# Altium PCB PCB_Tsal.PcbDoc
Units mm, origin at the board's own origin, x right, y up, seen from the top; angles counter-clockwise.
Board outline 49.2 x 43.9 mm, 2 copper layers (Top Layer, Bottom Layer); 12 components, 10 nets, 32 pads, 7 vias.
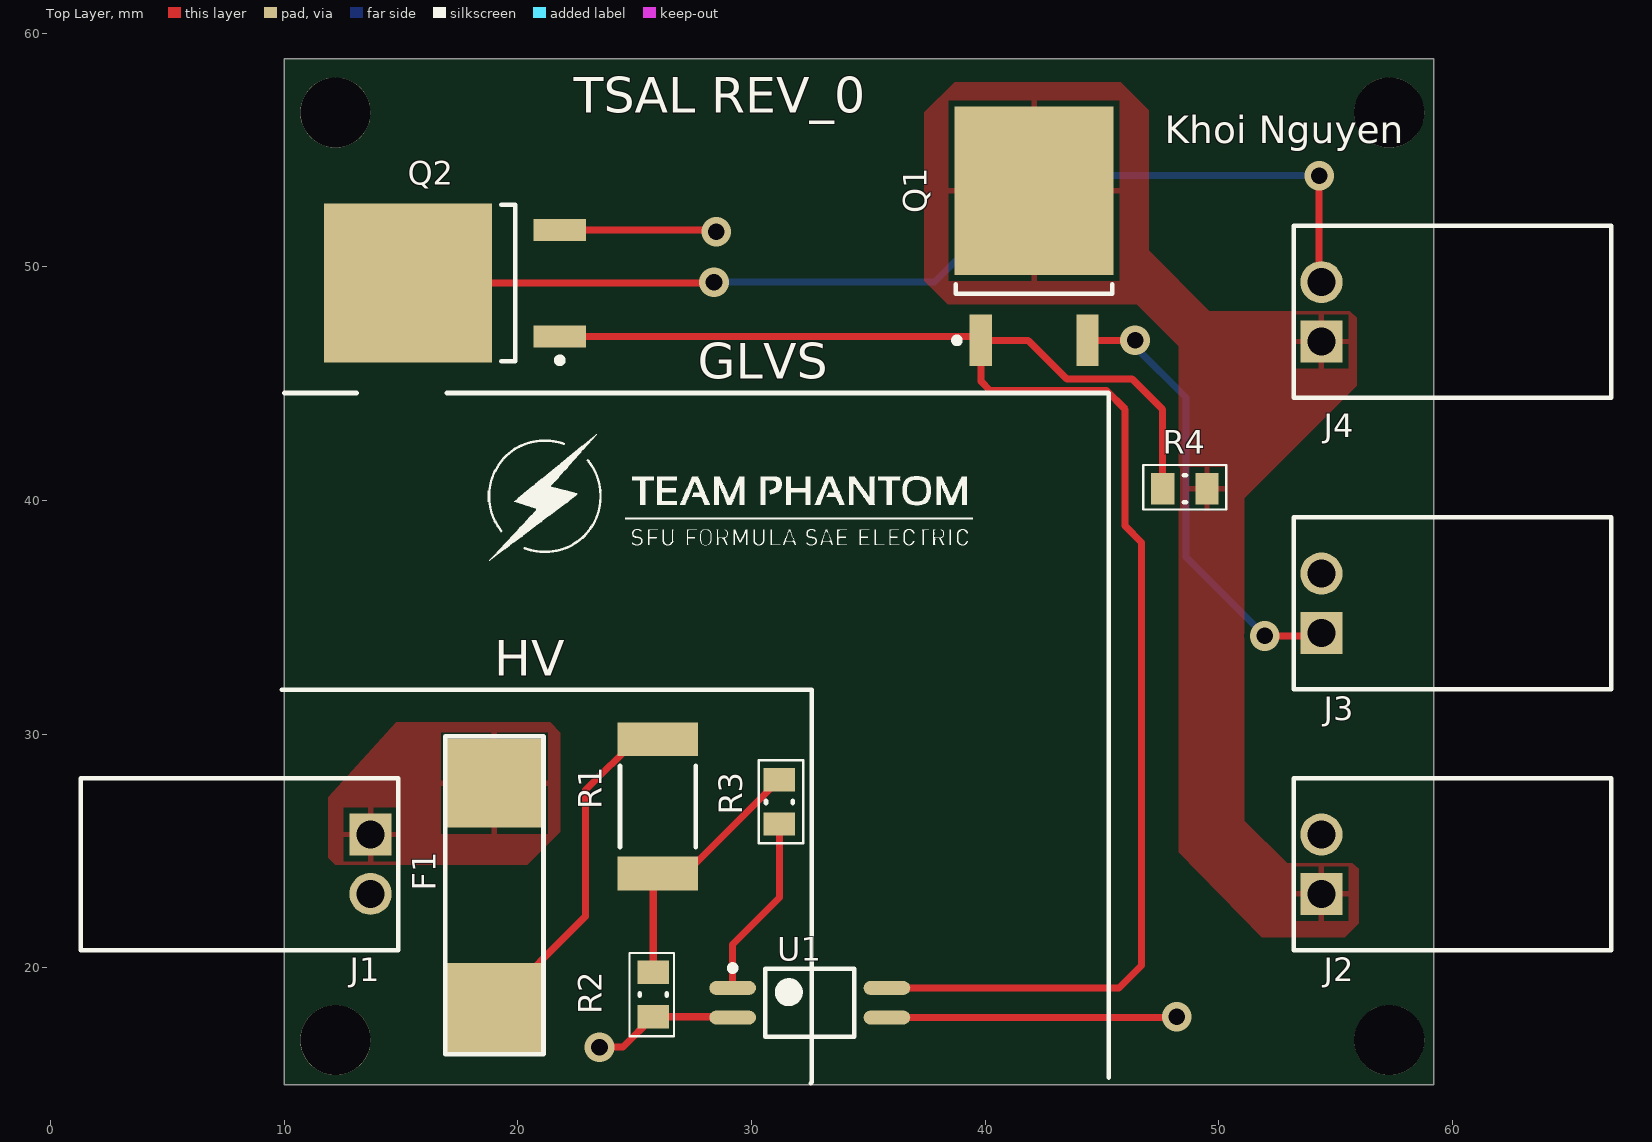
[diagram p0: Top Layer view]
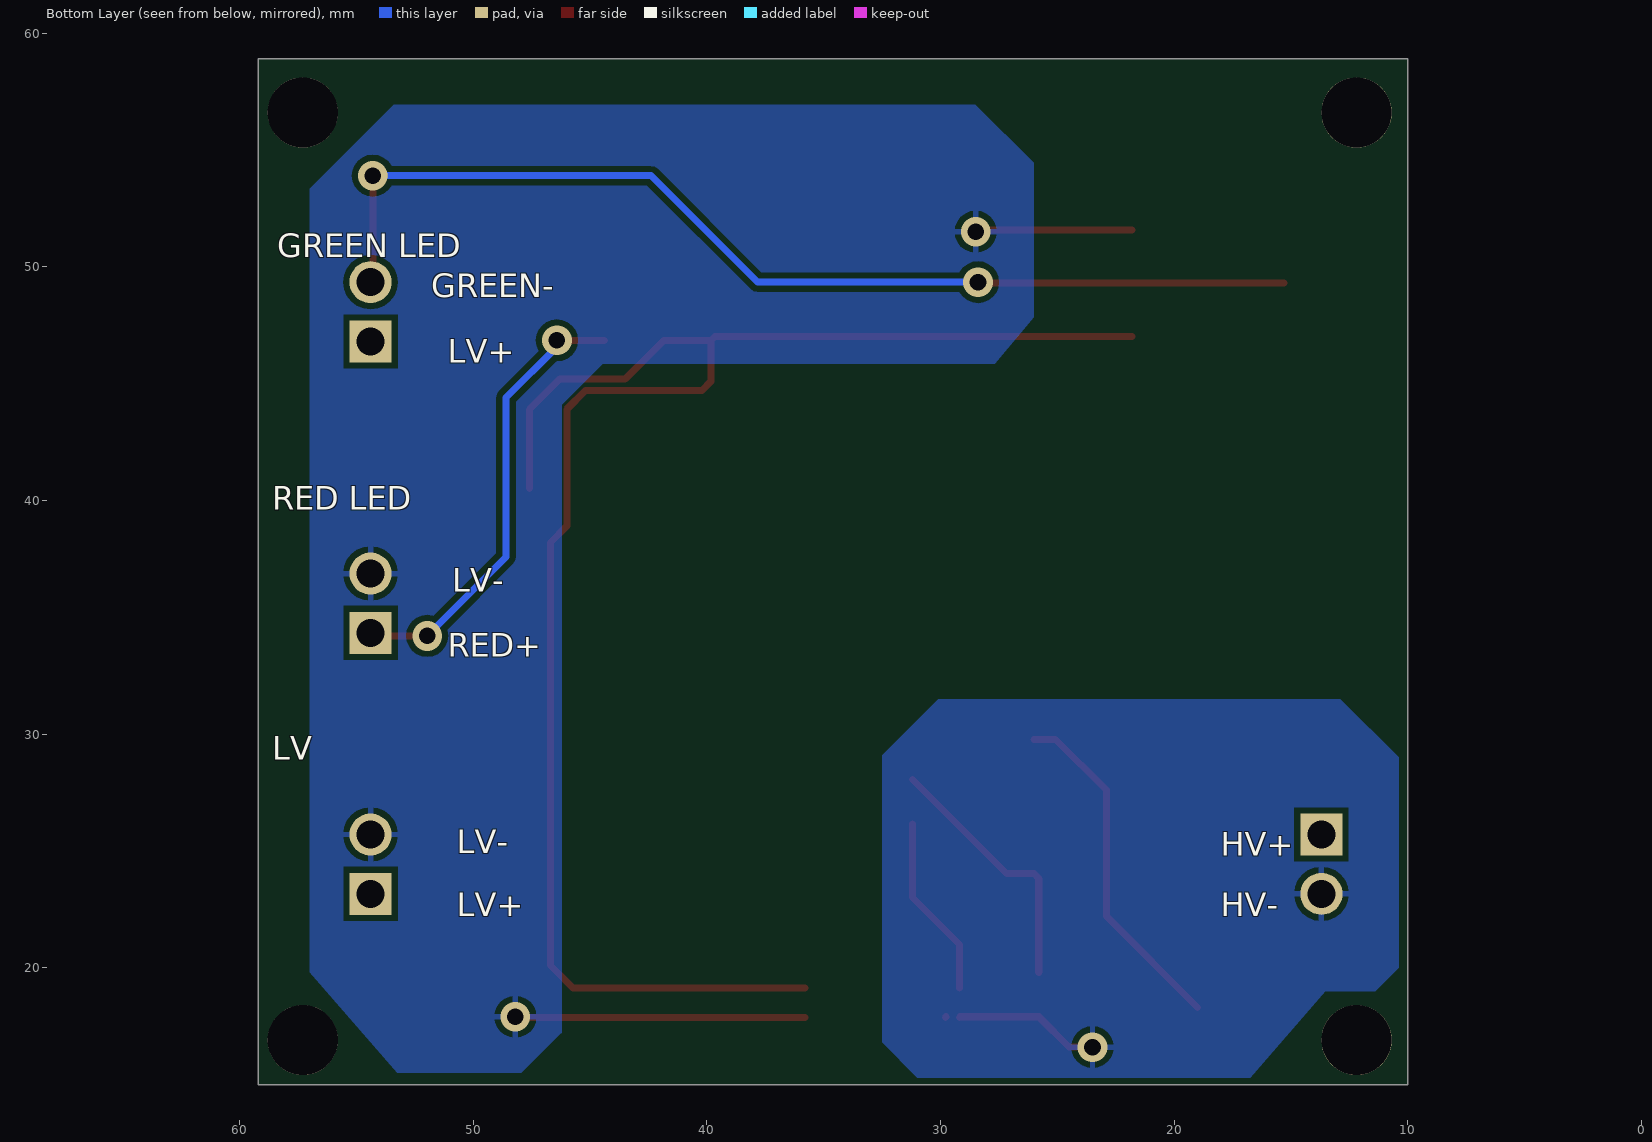
[diagram p1: Bottom Layer view, seen from below]

## Layer stack, top to bottom
Top Solder: solder mask 0.0102, Solder Resist, Dk 3.5
Top Layer: signal copper 0.0356
Dielectric 1: dielectric 0.32, FR-4, Dk 4.8
Bottom Layer: signal copper 0.0356
Bottom Solder: solder mask 0.0102, Solder Resist, Dk 3.5

## Board outline
10,15 59.2,15 59.2,58.9 10,58.9

## Design rules (kind name [scope] priority, off if disabled: settings)
Clearance [All] p1: gap=0.254 ignorepadtopadclearanceinfootprint=TRUE except(0: Arc-Hole Track-Hole SMDPad-Hole THPad-Hole Via-Hole Fill-Hole Poly-Hole Region-Hole Text-Hole)
PolygonConnect [All] p1: connectstyle=Relief reliefconductorwidth=0.254 reliefentries=4 polygonreliefangle="90 Angle" airgapwidth=0.254
RoutingVias [All] p1: holewidth=0.711 width=1.27 viastyle="Through Hole" minholewidth=0.711 minwidth=1.27 maxholewidth=0.711 maxwidth=1.27
SolderMaskExpansion [All] p1: expansion=0.102
Width [All] p1: maxlimit=1 minlimit=0.254 preferedwidth=0.3 minimp=50.000000 maximp=50.000000 favimp=50.000000
30 further rules are at their usual default settings.

## Components (designator, comment, footprint, x,y, rotation, side; value= is the part's Value field where it differs from the comment)
F1 "Fuse" FUSE_SMD 19,25.3 r270 top
J1 "HV" 2_PIN_CONNECTOR 1.3,24.43 r270 top
J2 "LV" 2_PIN_CONNECTOR 66.8,24.43 r90 top
J3 "RED LED" 2_PIN_CONNECTOR 66.8,35.6 r90 top
J4 "GREEN LED" 2_PIN_CONNECTOR 66.8,48.07 r90 top
Q1 "NTD2955T4G" DPAK228P991X238-3N 42.1,51.3 r90 top
Q2 "IPD50N06S4L-12" DPAK228P998X235-3N 17.3,49.3 r180 top
R1 "33k Ohm" RESC6332X07N 26,26.9 r90 top
R2 "1K OHm" RESC2012X06N 25.8,18.85 r90 top
R3 "190Ohm" RESC2012X06N 31.2,27.1 r270 top
R4 "560 Ohm" RESC2012X06N 48.55,40.5 r0 top
U1 "EL3H7(B)(TA)-VG" SOIC127P700X200-4N 32.5,18.5 r0 top

## Footprints (in the part's own frame and the unit in brackets; to place one, negate y for a bottom-side part, rotate by r counter-clockwise, add the part's x,y. Pads: shape width x height; smd on the part's side, far side on the other; paste and mask are expansions set on the pad)
2_PIN_CONNECTOR [mm]
  rect 1.8x1.8 hole 1.2: 1(-1.27,12.4)
  round 1.8 hole 1.2: 2(1.27,12.4)
  silkscreen extent -3.68,0 3.68,13.59, body extent -3.68,0 3.68,13.59, height 4.06
DPAK228P991X238-3N [mm] "D-PAK, 3-Pads, Body 6.21x6.73mm (max), IPC Medium Density"
  rect 2.2x0.95 smd: 1(-4.45,2.28) 3(-4.45,-2.28)
  rect 7.2x6.8 smd: 4(1.95,0)
  silkscreen extent -4.57,-3.35 -2.05,3.43, body extent -4.6,-3.37 5.31,3.37, height 2.38
DPAK228P998X235-3N [mm] "D-PAK, 3-Pads, Body 6.31x6.69mm (max), IPC Medium Density"
  rect 2.25x0.95 smd: 1(-4.5,2.28) 3(-4.5,-2.28)
  rect 7.2x6.8 smd: 4(2,0)
  silkscreen extent -4.62,-3.35 -2,3.43, body extent -4.62,-3.32 5.36,3.32, height 2.45
FUSE_SMD [mm]
  rect 3.81x4.06 smd: 1(-2.6,0) 2(7,0)
  silkscreen extent -4.6,-2.1 9,2.1
RESC2012X06N [mm] "Chip Resistor, 2-Leads, Body 2.00x1.25mm, IPC Medium Density"
  rect 1x1.35 smd: 1(-0.95,0) 2(0.95,0)
  silkscreen extent -1.78,-0.89 1.78,1.02, body extent -1.1,-0.67 1.1,0.67, height 0.6
RESC6332X07N [mm] "Chip Resistor, 2-Leads, Body 6.30x3.20mm, IPC Medium Density"
  rect 1.45x3.45 smd: 1(-2.875,0) 2(2.875,0)
  silkscreen extent -1.75,-1.63 1.75,1.63, body extent -3.25,-1.73 3.25,1.73, height 0.7
SOIC127P700X200-4N [mm] "SOIC, 4-Leads, Body 2.70x4.40mm, Pitch 1.27mm, IPC Medium Density"
  oval 2x0.6 smd: 1(-3.3,0.635) 2(-3.3,-0.635) 3(3.3,-0.635) 4(3.3,0.635)
  silkscreen extent -3.42,-1.45 1.9,1.61, body extent -2.3,-1.45 2.3,1.45, height 2

## Part data
F1: library part 0678D0800-02, Case/Package=SMD/SMT, Current Rating=800mA, DC Cold Resistance=380mR, Manufacturer=Bel, Max Operating Temperature=125°C, Min Operating Temperature=-55°C, Supplier Part Number 1=507-2258-6-ND, Voltage Rating (AC)=350V, Voltage Rating (DC)=250V, Approvals=cURus, Fuse Type="Board Mount (Cartridge Style Excluded)", Manufacturer Part Number=0678D0800-02, Mount="Surface Mount", Packaging="Tape and Reel", Pricing 1="1=1.2, 5=1.164, 10=1.089, 50=0.901, 100=0.7508, 250=0.732, 500=0.61936, 1000=0.54429 (USD)", Stock 1=2000, Supplier 1=Digi-Key
J1 J2 J3 J4: library part 0705530001, Color=Black, Contact Resistance=30mR, Manufacturer=Molex, Max Operating Temperature=105°C, Min Operating Temperature=-40°C, Supplier Part Number 1=WM4900-ND, ComponentLink1Description=https://www.molex.com/pdm_docs/ps/PS-70400.pdf?src-supplier=Digi-Key, ComponentLink1URL=https://www.molex.com/pdm_docs/ps/PS-70400.pdf?src-supplier=Digi-Key, ComponentLink2Description=http://www.molex.com/webdocs/datasheets/pdf/en-us/0705530001_PCB_HEADERS.pdf?src-supplier=Avnet, ComponentLink2URL=http://www.molex.com/webdocs/datasheets/pdf/en-us/0705530001_PCB_HEADERS.pdf?src-supplier=Avnet, Connector Type="Male Pin", Contact Material=Bronze, Contact Mating Length=0.24inch, Contact Plating=Gold, Depth=13.59mm, Fastening Type=Latch, Housing Color=Black, Housing Material=Polyester, Length=7.37mm, Manufacturer Part Number=0705530001, Mount="Through Hole", Number of Contacts=2, Number of Positions=2, Number of Rows=1, Orientation="Right Angle", Packaging=Rail/Tube, Pitch=2.54mm, Pricing 1="1=0.71, 72=0.53486, 144=0.51264, 504=0.44575, 1008=0.36775, 5040=0.32318, 10008=0.30089 (USD)", Radiation Hardening=No, Stock 1=14591, Supplier 1=Digi-Key, Termination=Solder
Q1: "Trans MOSFET P-CH 60V 12A 3-Pin(2+Tab) DPAK T/R", Case/Package=DPAK, Continuous Drain Current (ID)=12A, Current Rating=-12A, Drain to Source Breakdown Voltage=-60V, Drain to Source Resistance=155mR, Gate to Source Voltage (Vgs)=20V, Input Capacitance=750pF, Manufacturer="ON Semiconductor", Max Operating Temperature=175°C, Max Power Dissipation=55W, Min Operating Temperature=-55°C, On-State Resistance=180mR, Package Quantity=1, Supplier Part Number 1=NTD2955T4GOSCT-ND, Threshold Voltage=-2.8V, ComponentLink1Description=http://www.onsemi.com/pub/Collateral/NTD2955-D.PDF?src-supplier=Avnet, ComponentLink1URL=http://www.onsemi.com/pub/Collateral/NTD2955-D.PDF?src-supplier=Avnet, ComponentLink2Description=http://www.onsemi.com/pub/Collateral/NTD2955-D.PDF?src-supplier=Avnet+Europe, ComponentLink2URL=http://www.onsemi.com/pub/Collateral/NTD2955-D.PDF?src-supplier=Avnet+Europe, ComponentLink3Description=http://www.onsemi.com/pub_link/Collateral/NTD2955-D.PDF?src-supplier=Element14, ComponentLink3URL=http://www.onsemi.com/pub_link/Collateral/NTD2955-D.PDF?src-supplier=Element14, ComponentLink4Description=http://www.onsemi.com/pub/Collateral/NTD2955-D.PDF?src-supplier=Digi-Key, ComponentLink4URL=http://www.onsemi.com/pub/Collateral/NTD2955-D.PDF?src-supplier=Digi-Key, ComponentLink5Description=http://www.jameco.com/Jameco/Products/ProdDS/1178118.pdf?src-supplier=Jameco, ComponentLink5URL=http://www.jameco.com/Jameco/Products/ProdDS/1178118.pdf?src-supplier=Jameco, Contact Plating=Matte,Tin, Drain to Source Voltage (Vdss)=-60V, Element Configuration=Single, Fall Time=48ns, Height=2.38mm, Lead Free="Lead Free", Length=6.73mm, Manufacturer Part Number=NTD2955T4G, Nominal Vgs=-2.8V, Number of Channels=1, Number of Elements=1, Number of Pins=3, Packaging="Tape and Reel", Power Dissipation=55W, Pricing 1="1=1.04, 10=0.912, 100=0.7036, 500=0.52118, 1000=0.41694 (USD)", Radiation Hardening=No, Rds On Max=180mR, REACH SVHC="No SVHC", Rise Time=45ns, Stock 1=44767, Supplier 1=Digi-Key, Turn-Off Delay Time=26ns, Turn-On Delay Time=10ns, Voltage Rating (DC)=-60V, Width=6.22mm
Q2: "MOSFET N-CH 60V 50A TO252-3-11", Case/Package=TO-252-3, Continuous Drain Current (ID)=50A, Drain to Source Resistance=21.6mR, Drain to Source Voltage (Vdss)=60V, Gate to Source Voltage (Vgs)=16V, Input Capacitance=2.89nF, Manufacturer=Infineon, Max Operating Temperature=175°C, Max Power Dissipation=50W, Min Operating Temperature=-55°C, Package Quantity=2500, Supplier Part Number 1=IPD50N06S4L12ATMA1CT-ND, ComponentLink1Description=http://www.infineon.com/dgdl/Infineon-IPD50N06S4L_12-DS-v01_00-en.pdf?folderId=db3a30431a5c32f2011a8084a04a6500&fileId=db3a30431ff9881501203885cc580ca0&ack=t&src-supplier=Digi-Key, ComponentLink1URL=http://www.infineon.com/dgdl/Infineon-IPD50N06S4L_12-DS-v01_00-en.pdf?folderId=db3a30431a5c32f2011a8084a04a6500&fileId=db3a30431ff9881501203885cc580ca0&ack=t&src-supplier=Digi-Key, Element Configuration=Single, Fall Time=5ns, Halogen Free="Halogen Free", Height=2.3mm, Lead Free="Lead Free", Length=6.5mm, Manufacturer Part Number=IPD50N06S4L-12, Max Dual Supply Voltage=60V, Number of Pins=3, Packaging="Tape and Reel", Pricing 1="1=0.78, 10=0.689, 100=0.5268, 500=0.41736, 1000=0.33429 (USD)", Rds On Max=12mR, Rise Time=2ns, Stock 1=0, Supplier 1=Digi-Key, Turn-Off Delay Time=25ns, Turn-On Delay Time=6ns, Width=6.22mm
R1: library part RMCF2512JT33K0, "RES SMD 33K OHM 5% 1W 2512", Case/Package=2512, Case Code (Metric)=6432, Manufacturer="Stackpole Electronics", Max Operating Temperature=155°C, Max Power Dissipation=1W, Min Operating Temperature=-55°C, Resistance=33kR, Supplier Part Number 1=RMCF2512JT33K0CT-ND, Temperature Coefficient=100ppm/°C, Tolerance=5%, Case Code (Imperial)=2512, Composition="Thick Film", Contact Plating=Tin,Matte, Features="Automotive AEC-Q200", Height=0.028inch, Lead Free="Lead Free", Length=0.248inch, Manufacturer Part Number=RMCF2512JT33K0, Mount="Surface Mount", Number of Terminations=2, Packaging="Tape and Reel", Power Rating=1W, Pricing 1="1=0.3, 10=0.254, 100=0.0993, 1000=0.04158 (USD)", Radiation Hardening=No, Stock 1=37651, Supplier 1=Digi-Key, Width=0.126inch
R2: library part RNCP0805FTD1K00, "RES 1K OHM 1% 1/4W 0805", Case/Package=0805, Case Code (Metric)=2012, Manufacturer="Stackpole Electronics", Max Operating Temperature=155°C, Max Power Dissipation=250mW, Min Operating Temperature=-55°C, Resistance=1kR, Supplier Part Number 1=RNCP0805FTD1K00DKR-ND, Temperature Coefficient=100ppm/°C, Tolerance=1%, Case Code (Imperial)=0805, Composition="Thin Film", Features="Moisture Resistant,Anti-Sulfur", Height=0.024inch, Lead Free="Lead Free", Length=0.079inch, Manufacturer Part Number=RNCP0805FTD1K00, Mount="Surface Mount", Number of Terminations=2, Packaging="Tape and Reel", Power Rating=250mW, Pricing 1="1=0.1, 10=0.072, 100=0.0277, 1000=0.0122, 2500=0.01053 (USD)", Stock 1=903429, Supplier 1=Digi-Key, Width=0.049inch
R3: library part RC0805FR-0719R1L, Case/Package=0805, Case Code (Metric)=2012, Manufacturer=Yageo, Max Operating Temperature=155°C, Min Operating Temperature=-55°C, Power Rating=125mW, Resistance=19.1R, Supplier Part Number 1=311-19.1CRCT-ND, Temperature Coefficient=100ppm/°C, Tolerance=1%, Voltage Rating=150V, Case Code (Imperial)=0805, Composition="Thick Film", Contact Plating=Tin,Matte, Depth=1.25mm, Height=0.5mm, Lead Free="Lead Free", Length=2mm, Manufacturer Part Number=RC0805FR-0719R1L, Military Standard=Not, Packaging="Tape and Reel", Pricing 1="1=0.1, 10=0.042, 100=0.017, 1000=0.00762, 2500=0.00662 (USD)", Radiation Hardening=No, Stock 1=17015, Supplier 1=Digi-Key, Termination=SMD/SMT, Voltage Rating (DC)=150V, Width=1.25mm
R4: library part ESR10EZPJ561, "RES SMD 560 OHM 5% 0.4W 0805", Case/Package=0805, Case Code (Metric)=2012, Manufacturer=Rohm, Max Operating Temperature=155°C, Max Power Dissipation=400mW, Min Operating Temperature=-55°C, Package Quantity=1, Power Rating=250mW, Resistance=560R, Supplier Part Number 1=RHM560KDKR-ND, Temperature Coefficient=200ppm/°C, Tolerance=5%, Case Code (Imperial)=0805, ComponentLink1Description=http://www.rohm.com/web/global/datasheet/ESR01MZPF/esr-e?src-supplier=Digi-Key, ComponentLink1URL=http://www.rohm.com/web/global/datasheet/ESR01MZPF/esr-e?src-supplier=Digi-Key, ComponentLink2Description=https://www.rohm.com/datasheet/ESR01MZPF/esr-e?src-supplier=Digi-Key, ComponentLink2URL=https://www.rohm.com/datasheet/ESR01MZPF/esr-e?src-supplier=Digi-Key, ComponentLink3Description=http://www1.futureelectronics.com/doc/ROHM%20SEMICONDUCTOR/ESR10EZPD.pdf?src-supplier=Future+Electronics, ComponentLink3URL=http://www1.futureelectronics.com/doc/ROHM%20SEMICONDUCTOR/ESR10EZPD.pdf?src-supplier=Future+Electronics, Composition="Thick Film", Features="Automotive AEC-Q200", Height=0.026inch, Lead Free="Lead Free", Length=0.079inch, Manufacturer Part Number=ESR10EZPJ561, Number of Terminations=2, Packaging="Tape and Reel", Pricing 1="1=0.1, 10=0.083, 100=0.0318, 1000=0.01398, 2500=0.01207 (USD)", Stock 1=10361, Supplier 1=Digi-Key, Width=0.049inch
U1: "OPTOISOLATOR 3.75KV TRANS 4-SSOP", Case/Package=SSOP, Collector Emitter Breakdown Voltage=80V, Collector Emitter Saturation Voltage=200mV, Current Transfer Ratio=260%, Forward Current=50mA, Forward Voltage=1.4V, Isolation Voltage=3.75kV, Manufacturer=Everlight, Max Operating Temperature=125°C, Max Power Dissipation=200mW, Min Operating Temperature=-55°C, Package Quantity=1, Reverse Breakdown Voltage=6V, Supplier Part Number 1=1080-1197-6-ND, Approvals=UL, Collector Emitter Voltage (VCEO)=80V, ComponentLink1Description=https://everlightamericas.com/index.php?controller=attachment&id_attachment=2584&src-supplier=Digi-Key, ComponentLink1URL=https://everlightamericas.com/index.php?controller=attachment&id_attachment=2584&src-supplier=Digi-Key, ComponentLink2Description=https://everlightamericas.com/index.php?controller=attachment&amp;id_attachment=2584&src-supplier=Digi-Key, ComponentLink2URL=https://everlightamericas.com/index.php?controller=attachment&amp;id_attachment=2584&src-supplier=Digi-Key, ComponentLink3Description=https://www.verical.com/server-webapp/html/getDatasheet?partID=416716&src-supplier=Verical, ComponentLink3URL=https://www.verical.com/server-webapp/html/getDatasheet?partID=416716&src-supplier=Verical, Fall Time=18000ns, Lead Free="Lead Free", Manufacturer Part Number=EL3H7(B)(TA)-VG, Max Collector Current=50mA, Max Input Current=50mA, Max Output Voltage=80V, Mount="Surface Mount", Number of Channels=1, Number of Elements=1, Number of Pins=4, Output Current per Channel=50mA, Packaging="Tape and Reel", Power Dissipation=200mW, Pricing 1="1=0.42, 10=0.304, 25=0.248, 100=0.1985, 250=0.16752, 500=0.1427, 1000=0.11167, 2500=0.10237 (USD)", Radiation Hardening=No, Rise Time=18000ns, Stock 1=119652, Supplier 1=Digi-Key

## Free pads (board coordinates)
  round 3 hole 3: 1(12.2,16.9) 2(12.2,56.6) 3(57.3,56.6) 4(57.3,16.9)

## Via types
v1: diameter 1.27, hole 0.711, Top Layer to Bottom Layer, 7 vias

## Nets (pads, with @x,y where several pads share a name; then routed paths per layer and width w, separated by ;. In a path a pad name is that pad's centre, name@x,y a point inside that pad or via, vN(x,y) a via of type N, cw(c..) or ccw(c..) an arc to the next point about the centre after c; other vN are vias at no path point)
ANODE: R3.2 U1.1 | length 7.8
  Top Layer w0.3: U1.1 29.2,21 31.2,23 R3.2
HV+: F1.1 J1.1
HV-: J1.2 R2.1 U1.2 | length 6.3
  Top Layer w0.3: v1(23.5,16.6) 24.5,16.6 R2.1 29.165,17.9 U1.2 ; U1.2@29.765,17.9 U1.2@29.8,17.865
INPUT: R1.1 R2.2 R3.1 | length 11.2
  Top Layer w0.3: R2.2 25.8,23.825 R1.1 27.175,24.025 R3.1
LV+: J2.1 J4.1 Q1.4 R4.2
LV_GND: J2.2 J3.2 Q2.3 U1.3 | length 19.1
  Top Layer w0.3: Q2.3 28.42,51.58 v1(28.5,51.5) ; U1.3 48.165,17.865 v1(48.2,17.9)
"N Drain": J4.2 Q2.4 | length 45.5
  Top Layer w0.3: Q2.4 28.36,49.3 v1(28.4,49.34) ; v1(54.3,53.9) 54.3,49.44 J4.2
  Bottom Layer w0.3: v1(28.4,49.34) 37.84,49.34 42.4,53.9 v1(54.3,53.9)
"N GATE": Q1.1 Q2.1 R4.1 U1.4 | length 74.3
  Top Layer w0.3: Q2.1 39.65,47.02 Q1.1 ; U1.4 45.735,19.135 46.7,20.1 46.7,38.2 46,38.9 46,43.9 45.2,44.7 40.22,44.7 39.82,45.1 Q1.1 ; R4.1 47.6,43.9 46.3,45.2 43.5,45.2 41.85,46.85 Q1.1
"R IN": F1.2 R1.2 | length 14.9
  Top Layer w0.3: F1.2 22.9,22.2 22.9,27.6 25.075,29.775 R1.2
"RED LED": J3.1 Q1.3 | length 19.5
  Top Layer w0.3: Q1.3 v1(46.423,46.85) ; v1(51.977,34.2) 54.27,34.2 J3.1
  Bottom Layer w0.3: v1(46.423,46.85) 46.423,46.577 48.6,44.4 48.6,37.577 v1(51.977,34.2)

## Polygon pours and split planes (outlines as drawn)
LV+ on Top Layer "Top Layer-LV+" (solid, pour order 28): 46.501,48.405 48.3,46.608 48.3,24.943 51.855,21.305 55.403,21.305 56.006,21.908 56.006,24.244 55.721,24.46 52.938,24.46 51.1,26.298 51.1,40.1 55.9,44.9 55.9,47.808 55.603,48.105 49.595,48.105 47.002,50.698 47.002,56.706 45.803,57.905 38.703,57.905 37.403,56.605 37.403,49.405 38.403,48.405
no net on Top Layer "Top Layer-No Net" (solid, pour order 16): 13.3,29.3
HV+ on Top Layer "Top Layer-HV+" (solid, pour order 14): 21.825,30.059 21.384,30.5 14.8,30.5 11.9,27.3 11.9,26.15 11.9,24.7 12.2,24.4 20.4,24.4 21.825,25.825
LV_GND on Bottom Layer "Bottom Layer-LV_GND" (solid, pour order 42): 44.459,45.841 46.207,44.093 46.207,16.141 46.307,16.041 46.307,17.144 47.952,15.5 53.251,15.5 57.007,19.795 57.007,53.341 53.407,56.941 28.507,56.941 26.007,54.441 26.007,47.841 27.674,45.841
no net on Bottom Layer "Bottom Layer-No Net" (solid, pour order 40): 23.8,52.4
no net on Bottom Layer "Bottom Layer-No Net 1" (solid, pour order 38): 23.5,54.7
no net on Bottom Layer "Bottom Layer-No Net 2" (solid, pour order 34): 51.7,19.5
HV- on Bottom Layer "Bottom Layer-HV-" (solid, pour order 18): 31,15.3 32.5,16.8 32.5,29.1 30.1,31.5 12.9,31.5 10.4,29 10.4,20 11.4,19 13.543,19 16.743,15.3

## Silkscreen, mask and mechanical layers (free items; w line width, h text height)
Top Overlay:
  drawing of 49 lines, arcs and shapes, not listed
  text "TSAL REV_0" at 22.4,56.6 h1.52
  text "Khoi Nguyen" at 47.7,54.9 h2
  text "GLVS" at 27.7,45.2 h1.52
  text "HV" at 19,32.5 h1.52
Bottom Overlay:
  text "GREEN LED" at 58.4,50.4 h1
  text "GREEN-" at 51.8,48.7 h1
  text "LV+" at 51.1,45.9 h1
  text "RED LED" at 58.6,39.6 h1
  text "LV-" at 50.9,36.1 h1
  text "RED+" at 51.1,33.3 h1
  text "LV" at 58.6,28.9 h1
  text "LV-" at 50.7,24.9 h1
  text "HV+" at 18,24.8 h1
  text "HV-" at 18,22.2 h1
  text "LV+" at 50.7,22.2 h1

## Dimensions
59.6,59 to 59.2,15 on Top Overlay
10,58.9 to 59.2,58.9 on Top Overlay
32.579,15.094 to 45.3,15.3 on Top Overlay
35.8,19.135 to 47.6,40.5 on Mechanical Dimensions
9.903,31.9 to 13.1,44.6 on Top Overlay
31.2,28.05 to 47.6,40.5 on Mechanical Dimensions
21.8,47.02 to 31.2,26.15 on Mechanical Dimensions